# Altium PCB serdes-interface.PcbDoc (part 3 of 3)
Units mm, origin at the board's own origin, x right, y up, seen from the top; angles counter-clockwise.
Board outline 39.62 x 39.62 mm, 6 copper layers (Top Layer, GND1, MidLayer1, VDD_negative, GND2, Bottom Layer); 177 components, 131 nets, 827 pads, 502 vias.
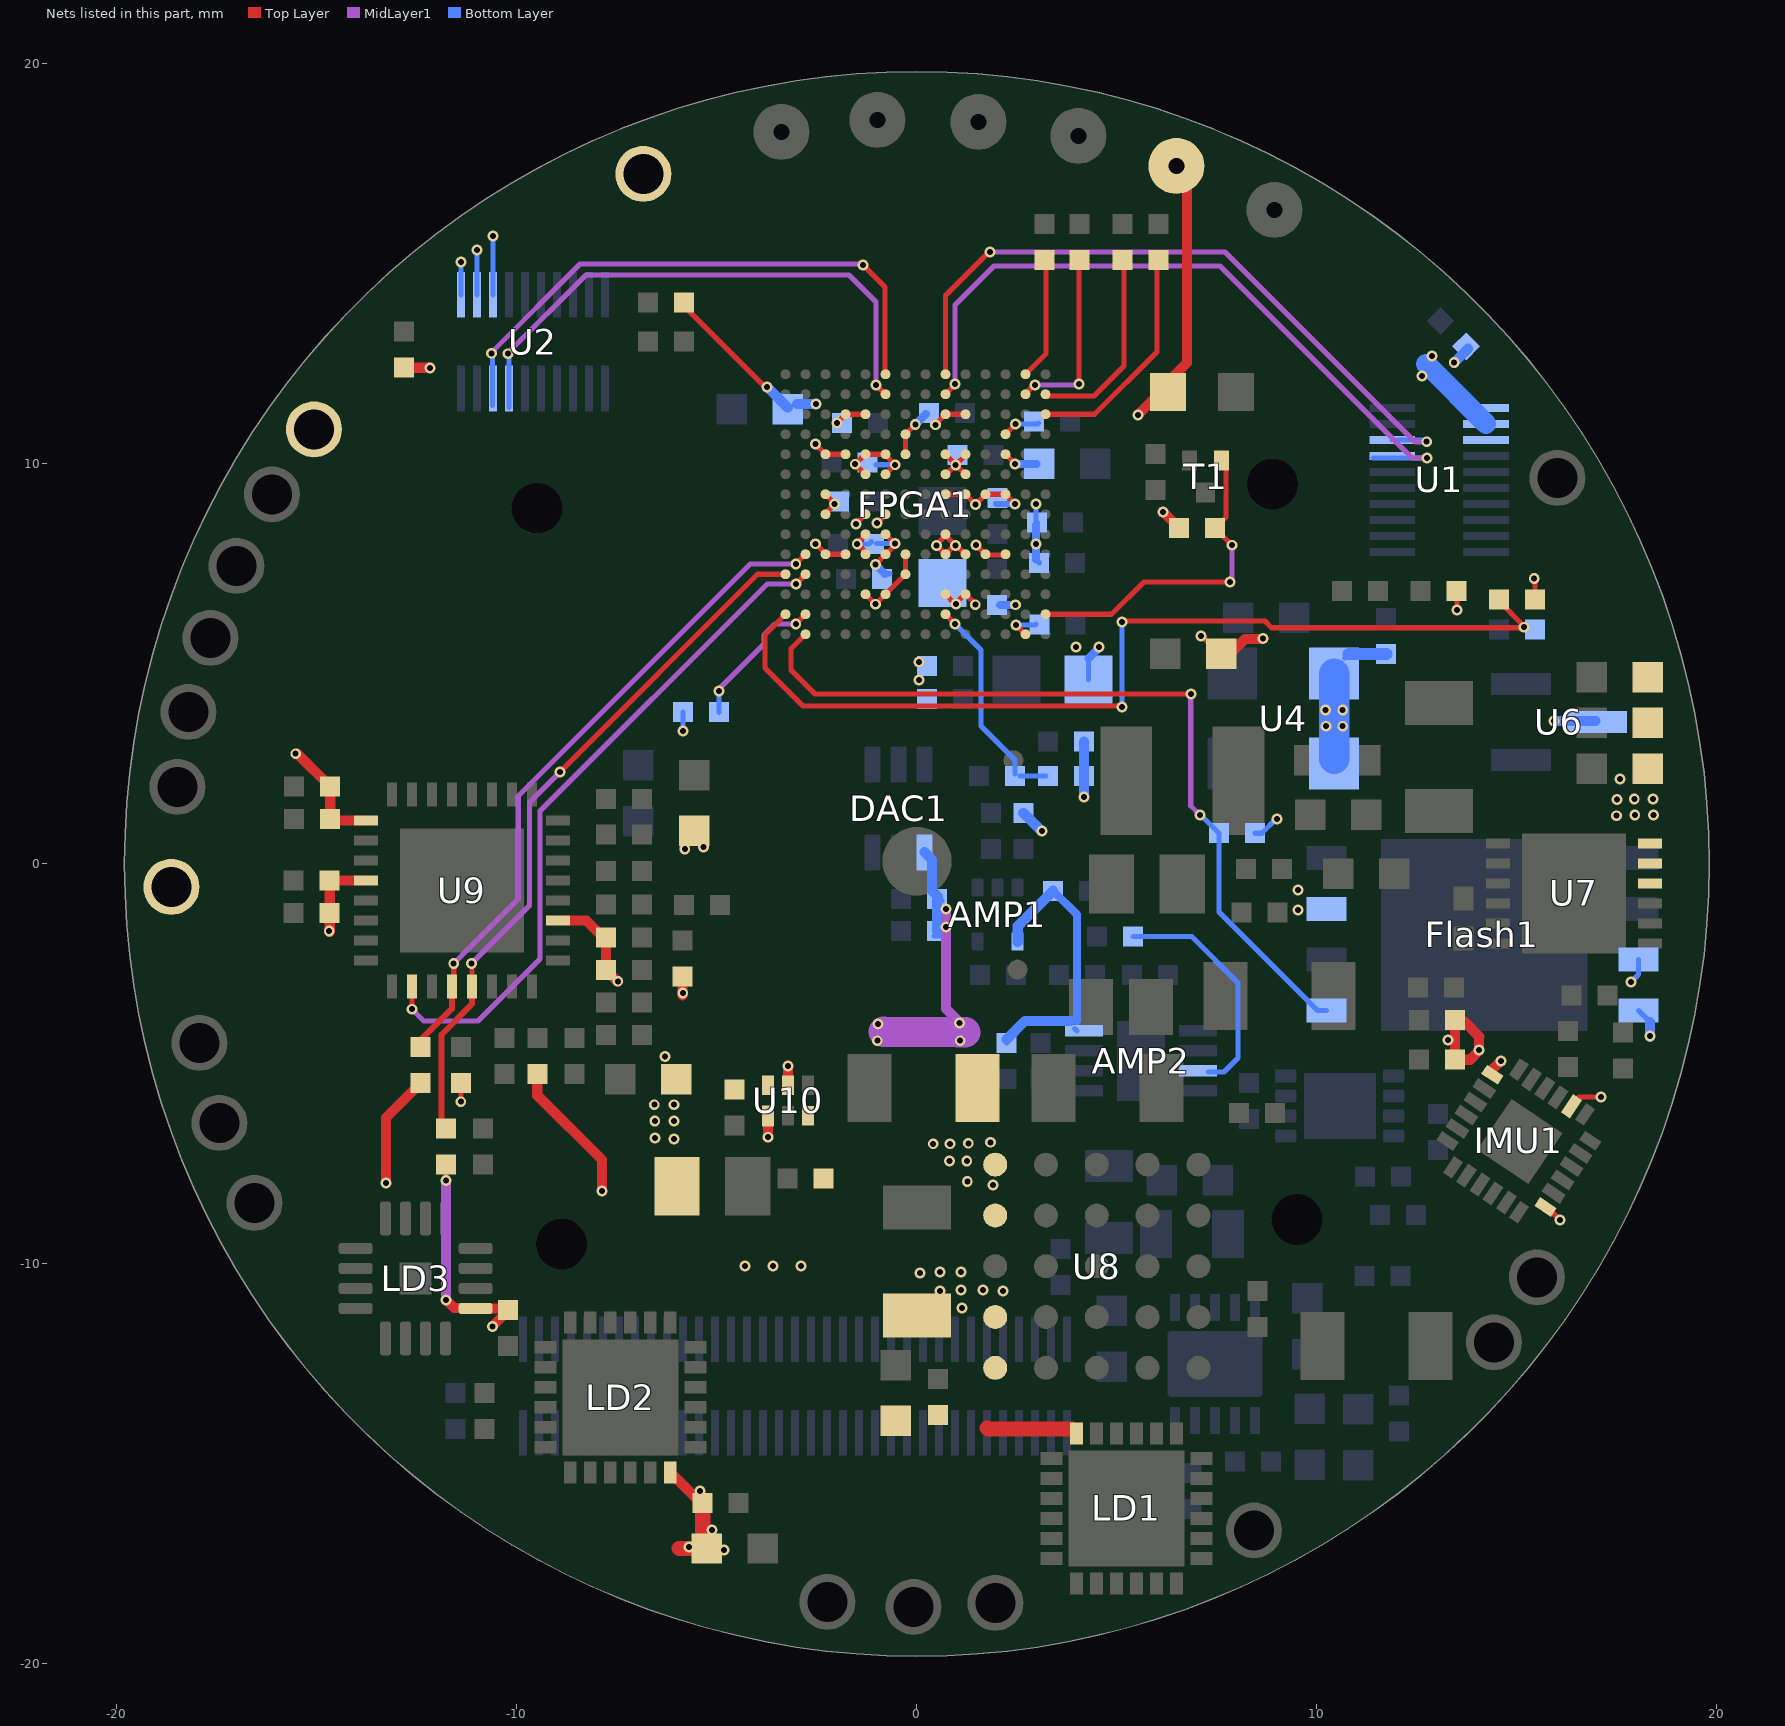
[diagram p7: the nets of this part, all layers, seen from the top]

## Via types
v1: diameter 0.27, hole 0.15, Top Layer to Bottom Layer, tented both sides, 501 vias
v2: diameter 0.5, hole 0.2, Top Layer to Bottom Layer, tented both sides, 1 vias

## Nets (pads, with @x,y where several pads share a name; then routed paths per layer and width w, separated by ;. In a path a pad name is that pad's centre, name@x,y a point inside that pad or via, vN(x,y) a via of type N, cw(c..) or ccw(c..) an arc to the next point about the centre after c; other vN are vias at no path point) (continued)
S_SELCTN: Flash1.1 FPGA1.P2 R15.1 | length 20.8
  Top Layer w0.13: FPGA1.P2@-2.788,5.742 -3.15,5.38 -3.15,4.85 -2.55,4.25 v1(6.85,4.25) v1@6.9,4.25
  MidLayer1 w0.13: v1@6.845,4.25 6.845,1.455 v1(7.075,1.225)
  Bottom Layer w0.13: v1(7.075,1.225) 7.092,1.225 R15.1@7.55,0.767 7.55,-1.2 10.015,-3.665 Flash1.1@10.237,-3.665
SCL: FPGA1.K2 R8.1 U9.4 | length 17
  Top Layer w0.13: U9.4@-11.625,-3.063 -11.582,-3.02 v1(-11.582,-2.489) ; v1@-3.05,7.5 v1(-3.03,7.5) FPGA1.K2@-2.788,7.742
  Top Layer w0.152: R8.1@-12.412,-4.579 -12.412,-4.412 -11.625,-3.624 U9.4@-11.625,-3.063
  MidLayer1 w0.13: v1(-11.582,-2.489) -9.97,-0.876 -9.97,1.699 -4.168,7.5 v1(-3.03,7.5)
SCLK_A+: FPGA1.B9 U1.14 | length 17.8
  Top Layer w0.13: FPGA1.B9@0.712,11.742 v1@0.95,11.98
  MidLayer1 w0.13: v1(0.95,12) 0.95,13.975 1.925,14.95 7.575,14.95 12.375,10.15 v1@12.725,10.15
  Bottom Layer w0.13: U1.14@11.4,10.15 v1(12.75,10.15)
SCLK_A-: FPGA1.A9 U1.13 | length 17.4
  Top Layer w0.13: FPGA1.A9@0.712,12.242 0.712,14.212 v1@1.813,15.312
  MidLayer1 w0.13: v1(1.825,15.3) 7.7,15.3 12.45,10.55 v1@12.75,10.55
  Bottom Layer w0.13: U1.13@11.873,10.601 12.774,10.601 v1@12.8,10.575
  other v1: 12.743,10.555
SCLK_B+: FPGA1.B6 U2.14 | length 14
  Top Layer w0.13: v1(-1.025,11.975) FPGA1.B6@-0.8,11.75 ; FPGA1.B6@-0.788,11.742 FPGA1.B6@-0.783,11.742
  MidLayer1 w0.13: v1@-10.25,12.752 -8.277,14.725 -1.7,14.725 -1.025,14.05 v1(-1.025,11.975)
  Bottom Layer w0.13: U2.14@-10.202,11.41 v1@-10.202,12.698
  other v1: -10.222,12.754
SCLK_B-: FPGA1.A6 U2.13 | length 14.4
  Top Layer w0.13: v1(-1.35,14.975) -0.8,14.425 FPGA1.A6@-0.8,12.225
  MidLayer1 w0.13: v1@-10.62,12.804 -8.424,15 v1@-1.375,15
  Bottom Layer w0.13: U2.13@-10.612,11.459 v1@-10.612,12.747
  other v1: -10.638,12.765
SDA: FPGA1.L1 R7.1 U9.5 | length 17.7
  Top Layer w0.13: U9.5@-11.125,-3.063 v1@-11.125,-2.502 ; v1(-8.925,2.3) -3.983,7.242 FPGA1.L1@-3.288,7.242
  Top Layer w0.152: R7.1@-11.887,-6.502 -11.887,-4.267 -11.125,-3.505 U9.5@-11.125,-3.063
  MidLayer1 w0.13: v1(-11.138,-2.489) -9.69,-1.041 -9.69,1.535 v1(-8.925,2.3)
TEMP: AMP1.4 AMP2.4 C74.2 R43.1 | length 7.1
  Bottom Layer w0.13: R43.1@2.242,-4.475 R43.1@2.242,-4.383 ; AMP2.4@3.937,-4.112 AMP2.4@4,-4.175
  Bottom Layer w0.203: C74.2@3.405,-0.671 4,-1.267 4,-3.925
  Bottom Layer w0.254: R43.1@2.242,-4.383 2.7,-3.925 3.837,-3.925 ; AMP1.4@2.519,-1.944 2.519,-1.557 C74.2@3.405,-0.671
TEMP2: AMP2.7 R42.1 | length 5.9
  Bottom Layer w0.13: R42.1@5.4,-1.817 6.867,-1.817 8.025,-2.975 8.025,-4.85 7.675,-5.2 AMP2.7@7.275,-5.2
VCC33: C39.2 C40.2 C58.2 C59.2 C60.2 T_VCC33.0 U1.8 U1.9 U1.10 U2.8 U2.9 U2.10 U7.10 U7.11 U7.12 | length 7
  Top Layer w0.13: C59.2@18.269,4.669 C59.2@18.269,4.921
  Top Layer w0.254: C40.2@-12.821,12.405 v1@-12.18,12.405
  Bottom Layer w0.13: U2.10@-11.401,14.226 v1@-11.401,15.051 ; U2.9@-11.001,14.226 v1(-11,15.35) ; U2.8@-10.601,14.226 v1@-10.601,15.699 ; 12.675,12.5 12.727,12.5
  Bottom Layer w0.254: v1@13.425,12.533 C39.2@13.779,12.887
  Bottom Layer w0.508: 12.727,12.5 U1.9@14.226,11.001
  other v1: 17.488,1.206 17.945,1.219 18.415,1.219 17.501,1.613 17.932,1.626 18.402,1.626 17.575,2.125 12.625,12.2 -12.175,12.4 13.431,12.537 12.875,12.7 -11.4,15.05 -10.6,15.7
VDD12: C24.2 C25.2 C26.2 C27.2 C28.2 C54.2 C61.2 FPGA1.E5 FPGA1.E6 FPGA1.E9 FPGA1.E10 FPGA1.F5 FPGA1.F6 FPGA1.F9 FPGA1.F10 FPGA1.J5 FPGA1.J6 FPGA1.J9 FPGA1.K5 FPGA1.K6 FPGA1.K9 FPGA1.K10 U8.A1 U8.B1 | length 9.8
  Top Layer w0.13: FPGA1.K5@-1.293,7.737 FPGA1.K5@-1.291,7.735 ; FPGA1.E5@-1.293,10.239 -1.299,10.239 v1(-1.544,9.994) -1.295,9.745 FPGA1.F5@-1.288,9.745 ; FPGA1.E5@-1.288,10.242 FPGA1.E6@-0.788,10.242 -0.788,10.221 v1(-0.546,9.979) -0.551,9.979 FPGA1.F6@-0.788,9.742 ; FPGA1.J5@-1.282,8.224 -1.287,8.224 -1.493,8.017 v1(-1.493,8.001) -1.251,7.759 FPGA1.K5@-1.251,7.723 ; FPGA1.J5@-1.28,8.233 FPGA1.J5@-1.263,8.25 ; FPGA1.K5@-1.279,7.751 FPGA1.K5@-1.275,7.747 ; v1(-1.038,7.488) FPGA1.K6@-0.784,7.742 ; FPGA1.K6@-0.799,7.719 -0.547,7.97 v1(-0.547,8.007) ; FPGA1.J6@-0.788,8.242 -0.563,8.017 v1@-0.544,8.017 ; FPGA1.K6@-0.784,7.761 FPGA1.K6@-0.784,7.742 ; FPGA1.K6@-0.779,7.758 -0.779,7.746 FPGA1.K6@-0.784,7.742 ; FPGA1.K9@0.7,7.75 0.475,7.975 0.725,8.225 FPGA1.J9@0.75,8.225 ; FPGA1.F9@0.703,9.694 0.703,9.709 v1(0.969,9.975) ; FPGA1.J9@0.712,8.242 0.712,8.213 0.967,7.958 v1@0.975,7.95 ; FPGA1.E9@0.712,10.242 0.97,9.983 v1@0.977,9.983 ; FPGA1.K9@0.725,7.75 0.932,7.957 v1(0.966,7.957) ; v1@0.975,7.957 0.993,7.957 v1@1,7.95 ; v1@0.981,7.972 1,7.953 v1@1,7.95 ; FPGA1.K10@1.225,7.725 v1@1,7.95 ; FPGA1.E10@1.236,10.283 1.236,10.242 v1@0.977,9.983 ; FPGA1.F10@1.243,9.721 1.223,9.721 v1(0.969,9.975) ; C54.2@1.515,-5.601 1.515,-5.474 C54.2@1.515,-5.274 ; v1(0.969,9.975) v1@0.977,9.983
  Top Layer w0.152: C54.2@1.515,-5.474 C54.2@1.896,-5.093
  Bottom Layer w0.13: v1(-1.493,8.001) -1.196,8.001 C26.2@-1.144,8.053 ; C28.2@-1.026,9.979 v1(-0.546,9.979) ; C26.2@-1.013,8.007 v1(-0.547,8.007) ; C24.2@-0.805,7.255 C24.2@-0.68,7.255
  Bottom Layer w0.203: v1(-1.038,7.488) C24.2@-0.805,7.255
  other v1: 1.9,-8.025 1.257,-7.938 0.813,-7.429 1.245,-7.429 0.406,-6.998 0.826,-6.998 1.283,-6.985 1.841,-6.96 0.05,4.6 0.05,5.05 0.491,7.957
VDD18: C4.2 C5.2 C6.2 C10.2 C11.2 C12.2 L2.2 L3.1 L4.2 R5.2 T_VDD18.0 U9.11 U9.28 U10.6 | length 5.9
  Top Layer w0.13: U9.28@-13.777,-0.415 U9.28@-13.775,-0.413 ; v1@-11.396,-6.003 R5.2@-11.396,-5.479 ; U10.6@-3.723,-5.528 U10.6@-3.721,-5.529
  Top Layer w0.254: v1@-14.683,-1.7 C5.2@-14.683,-1.227 C6.2@-14.683,-0.415 U9.28@-13.777,-0.415 ; U9.11@-8.848,-1.413 -8.265,-1.413 -7.844,-1.833 C11.2@-7.772,-1.833 C10.2@-7.772,-2.646 -7.493,-2.934 v1(-7.48,-2.934) ; v1@-5.863,-3.285 C12.2@-5.863,-2.818 ; v1(-5.804,0.368) L4.2@-5.804,0.648
  other v1: -6.075,-6.875 -6.55,-6.85 -6.553,-6.426 -6.071,-6.426 -6.566,-6.02 -6.071,-6.02 -11.405,-5.944 -6.299,-4.813 -5.855,-3.226 -14.694,-1.676 -5.334,0.419
VDD33: C3.2 C13.2 C14.2 C21.2 C22.2 C23.2 C29.2 C30.2 C31.2 C32.2 C33.2 C34.2 C35.2 C36.2 C38.2 C41.2 C42.2 C43.2 C44.2 C45.1 C46.1 C47.1 C55.2 C62.2 C63.2 C64.2 C70.1 C71.1 D1.1 DAC1.4 Flash1.3 Flash1.7 Flash1.8 FPGA1.C4 FPGA1.C5 FPGA1.C9 FPGA1.C10 FPGA1.D7 FPGA1.D12 FPGA1.E3 FPGA1.E4 FPGA1.E7 FPGA1.E12 FPGA1.G3 FPGA1.G9 FPGA1.G10 FPGA1.G11 FPGA1.G12 FPGA1.H3 FPGA1.H5 FPGA1.H6 FPGA1.K3 FPGA1.K4 FPGA1.K7 FPGA1.K11 FPGA1.K12 FPGA1.L7 FPGA1.M5 FPGA1.M6 FPGA1.M9 FPGA1.M10 FPGA1.P13 IMU1.1 IMU1.8 IMU1.13 LD1.24 LD2.24 LD3.1 R4.2 R7.2 R8.2 R11.2 R14.1 R15.2 R16.2 R19.2 R20.2 R22.1 R35.1 R41.2 T_VDD33_1.0 T_VDD33_2.0 U4.1 U4.4 U6.3 U8.D1 U8.E1 U9.25 U10.1 U10.3 U10.5 | length 74.3
  Top Layer w0.13: C14.2@-14.67,1.122 C14.2@-14.635,1.087 ; v1@-11.777,-7.819 R7.2@-11.777,-7.511 ; C45.1@-10.236,-11.184 C45.1@-10.236,-11.162 ; R11.2@-5.825,14.033 -5.825,13.95 v1@-3.775,11.9 ; C42.2@-5.378,-16 -5.358,-16 C42.2@-5.325,-16 ; v1@-2.549,10.499 -2.546,10.499 FPGA1.E3@-2.288,10.242 FPGA1.E4@-1.788,10.242 ; v1(-2.535,8.003) FPGA1.K3@-2.293,7.761 ; FPGA1.H3@-2.313,8.698 -2.313,8.739 v1(-2.056,8.996) ; FPGA1.H3@-2.3,8.725 -2.288,8.737 FPGA1.H3@-2.288,8.742 ; FPGA1.K3@-2.288,7.742 FPGA1.K4@-1.788,7.742 -1.786,7.742 FPGA1.K4@-1.784,7.744 ; FPGA1.G3@-2.288,9.242 -2.039,8.992 v1@-2.034,8.992 ; v1@-2.005,11.025 FPGA1.C4@-1.788,11.242 FPGA1.C5@-1.288,11.242 -1.267,11.242 FPGA1.C5@-1.25,11.225 ; FPGA1.K4@-1.776,7.749 FPGA1.K4@-1.765,7.749 ; v1@-1.55,8.5 -1.53,8.5 FPGA1.H5@-1.288,8.742 ; FPGA1.M5@-1.288,6.742 -1.052,6.505 v1@-1.021,6.505 ; v1(-1.034,6.493) v1@-1.021,6.505 ; v1(-1,8.525) -0.8,8.725 FPGA1.H6@-0.775,8.725 ; FPGA1.M6@-0.79,6.742 FPGA1.L7@-0.293,7.239 ; FPGA1.M6@-0.734,6.792 v1@-1.021,6.505 ; C43.2@-0.533,-13.767 C43.2@-0.522,-13.778 ; FPGA1.E7@-0.308,10.247 -0.288,10.267 FPGA1.D7@-0.288,10.742 ; FPGA1.D7@-0.296,10.743 -0.284,10.743 v1(-0.041,10.986) ; FPGA1.L7@-0.288,7.238 FPGA1.L7@-0.288,7.242 FPGA1.K7@-0.288,7.742 ; v1@0.45,11 0.47,11 FPGA1.C9@0.712,11.242 1.183,11.242 FPGA1.C10@1.2,11.225 ; C44.2@0.451,-13.926 C44.2@0.495,-13.881 ; FPGA1.M9@0.712,6.742 0.953,6.5 1.203,6.75 FPGA1.M10@1.225,6.75 ; FPGA1.G9@0.712,9.242 1.198,9.242 FPGA1.G10@1.229,9.21 ; FPGA1.M9@0.725,6.7 FPGA1.M9@0.725,6.717 ; FPGA1.M10@1.2,6.742 FPGA1.M10@1.217,6.725 ; FPGA1.M10@1.223,6.731 1.459,6.494 v1(1.459,6.48) v1@1.459,6.468 ; FPGA1.G10@1.236,9.217 v1@1.464,8.989 ; v1@1.473,8.975 1.473,8.981 v1@1.464,8.989 ; v1(1.475,7.975) 1.725,7.725 2.225,7.725 FPGA1.K12@2.25,7.75 ; FPGA1.G11@1.712,9.242 FPGA1.G12@2.192,9.242 ; FPGA1.G11@1.736,9.238 1.713,9.238 v1@1.464,8.989 ; U8.E1@1.956,-12.56 U8.E1@1.988,-12.592 ; FPGA1.G12@2.212,9.242 2.47,8.984 v1@2.47,8.971 ; FPGA1.E12@2.212,10.242 2.459,9.995 v1@2.459,9.99 ; FPGA1.E12@2.212,10.283 FPGA1.E12@2.233,10.262 ; FPGA1.D12@2.212,10.742 2.45,10.98 v1@2.45,11 ; v1(2.449,9.997) v1@2.45,9.995 ; v1@2.468,10.998 2.474,11.003 v1@2.474,11.014 ; v1(2.475,5.975) FPGA1.P13@2.7,5.75 ; LD1.24@3.875,-14.125 LD1.24@3.986,-14.237 ; D1.1@5.975,11.675 D1.1@6.3,11.675 ; D1.1@6.4,12.15 D1.1@6.4,12.175 ; R19.2@6.525,8.425 R19.2@6.6,8.425 ; v1@7.126,5.701 C21.2@7.493,5.334 ; C21.2@7.601,5.253 C21.2@7.831,5.253 ; R16.2@13.487,6.909 13.487,6.896 13.5,6.883 v1(13.5,6.35) ; C47.1@13.538,-3.937 C47.1@13.678,-3.937 ; IMU1.13@14.325,-5.25 IMU1.13@14.325,-5.2 ; R22.1@15.449,6.609 v1@15.449,7.119 ; IMU1.1@15.714,-8.579 15.754,-8.579 v1(16.075,-8.9) ; IMU1.8@16.375,-6 16.55,-5.825 v1(17.1,-5.825)
  Top Layer w0.254: v1@-15.491,2.756 C13.2@-14.67,1.935 C14.2@-14.67,1.122 ; C14.2@-14.635,1.087 U9.25@-13.775,1.087 ; v1@-13.275,-7.964 -13.275,-6.342 R8.2@-12.412,-5.479 ; v1(-11.775,-10.9) -11.575,-11.1 LD3.1@-11.4,-11.1 ; LD3.1@-11.035,-11.113 C45.1@-10.299,-11.113 ; v1(-10.614,-11.562) C45.1@-10.236,-11.184 ; R4.2@-9.491,-5.258 -9.491,-5.784 -7.875,-7.4 v1(-7.875,-8.175) ; LD2.24@-6.168,-15.21 C42.2@-5.378,-16 ; v1(-3.721,-6.833) U10.1@-3.721,-6.299 ; U10.5@-3.221,-5.529 v1(-3.221,-5.055) ; v1@5.55,11.25 D1.1@5.975,11.675 ; v1(6.15,8.8) R19.2@6.525,8.425 ; D1.1@6.4,12.175 6.75,12.525 6.75,17.185 T_VDD33_1.0@6.485,17.45 ; C21.2@7.831,5.253 8.204,5.626 v1@8.585,5.626 ; C47.1@13.449,-3.937 C46.1@13.449,-4.894 13.831,-4.894 v1@14.05,-4.675 ; C47.1@13.678,-3.937 14.059,-4.318 14.05,-4.327 v1(14.05,-4.65) ; IMU1.13@14.325,-5.2 v1(14.6,-4.925)
  Top Layer w0.381: -5.949,-17.115 C41.2@-5.252,-17.115 ; C41.2@-5.358,-17.032 -5.358,-16 C42.2@-5.358,-15.981 ; C43.2@-0.526,-13.926 C43.2@-0.392,-13.792 ; 1.75,-14.1 1.775,-14.125 LD1.24@3.875,-14.125
  MidLayer1 w0.254: v1@-11.773,-10.889 v1(-11.773,-7.912) ; v1(0.725,-1.125) 0.725,-3.625 v1@1.05,-3.95
  MidLayer1 w0.762: -0.825,-4.2 1.05,-4.203 ; 1.066,-4.203 1.08,-4.203 1.206,-4.204
  Bottom Layer w0.13: v1@-5.85,3.3 R14.1@-5.85,3.792 ; C29.2@-3.232,11.368 C29.2@-3.232,11.407 ; C32.2@0.221,11.248 C32.2@0.221,11.255 ; C71.1@0.425,-1.8 C71.1@0.6,-1.8 ; C70.1@0.45,-0.75 C70.1@0.625,-0.925 ; C64.2@1.965,9.007 C64.2@1.974,8.997 ; C22.2@2.057,6.454 C22.2@2.081,6.477 ; v1(2.465,11.001) 3.017,11.001 C33.2@3.037,11.021 ; v1(2.475,5.975) 2.95,5.975 C36.2@2.975,6 ; C30.2@2.975,7.608 C30.2@3.055,7.529 ; v1(2.975,9) 2.975,8.562 C35.2@3.007,8.531 ; C34.2@2.986,9.997 C34.2@2.994,10.005 ; v1(4.175,1.675) 4.15,1.675 4.15,1.625 v1@4.2,1.675 ; C62.2@4.285,4.607 C62.2@4.285,5.135 ; R15.2@8.45,0.767 8.617,0.767 v1@9,1.15 ; U4.1@10.427,2.629 U4.1@10.643,2.413 ; U4.4@10.695,5.145 U4.4@10.797,5.247 ; v1(17.85,-2.95) 18.037,-2.763 Flash1.7@18.037,-2.395 ; Flash1.8@18.037,-3.665 Flash1.8@18.325,-3.953
  Bottom Layer w0.152: C64.2@1.974,8.997 v1(2.451,8.997)
  Bottom Layer w0.203: v1(-0.041,10.986) C32.2@0.221,11.248 ; C22.2@2.081,6.477 v1(2.465,6.477) ; v1(2.449,9.997) C34.2@2.986,9.997 ; C30.2@2.975,7.608 v1(2.975,8) C35.2@2.975,8.475 ; C62.2@4.285,5.135 4.55,5.4 v1(4.55,5.425)
  Bottom Layer w0.254: v1(-3.75,11.925) C29.2@-3.232,11.407 ; C29.2@-3,11.5 v1(-2.525,11.5) ; DAC1.4@0.192,0.29 0.375,0.107 0.375,-0.675 C70.1@0.525,-0.825 ; C71.1@0.505,-1.671 C70.1@0.505,-0.871 ; R41.2@2.658,1.275 v1@3.108,0.825 ; v1(4.175,1.675) R35.1@4.175,3.058 ; v1(15.925,3.575) U6.3@16.964,3.575 ; v1@18.325,-4.325 Flash1.8@18.325,-3.953
  Bottom Layer w0.305: U4.4@10.797,5.247 C38.2@11.73,5.247
  Bottom Layer w0.762: U4.1@10.427,2.629 U4.4@10.427,4.759
  other v1: -4.825,-17.15 -5.7,-17.075 -5.125,-16.65 -5.425,-15.675 1.125,-11.1 0.575,-10.675 2.15,-10.675 1.1,-10.65 1.65,-10.65 0.075,-10.225 0.575,-10.2 1.1,-10.2 -4.3,-10.05 -3.6,-10.05 -2.9,-10.05 -13.275,-7.975 -0.991,-4.42 1.079,-4.42 13.275,-4.4 18.325,-4.3 -0.978,-4 1.067,-3.975 0.725,-1.575 9.525,-1.15 9.525,-0.65 3.125,0.825 9,1.125 -15.532,2.756 -5.85,3.325 10.223,3.442 10.643,3.442 10.211,3.848 10.643,3.848 3.975,5.425 8.649,5.639 7.1,5.7 0.975,6.5 15.43,7.137 -1.525,8.5 1.464,8.988 -2.538,10.495 0.465,10.977 -2,11.025 5.525,11.225
VS: FPGA1.L2 U9.2 | length 17.3
  Top Layer w0.13: v1@-12.625,-3.631 U9.2@-12.625,-3.063 ; v1(-3.025,7) -2.788,7.237 FPGA1.L2@-2.788,7.242
  MidLayer1 w0.13: v1(-12.624,-3.632) -12.332,-3.924 -10.973,-3.924 -9.423,-2.375 -9.423,1.321 -3.744,7 v1(-3.025,7)
X_DONE: FPGA1.N14 R19.1 T1.1 | length 8.5
  Top Layer w0.13: FPGA1.N14@3.212,6.242 4.867,6.242 5.675,7.05 v1(7.825,7.05) ; T1.1@7.725,10.275 7.725,8.667 R19.1@7.45,8.392 v1(7.875,7.967)
  MidLayer1 w0.13: v1@7.875,7 v1(7.875,7.967)
X_INIT: FPGA1.N2 R14.2 | length 3.6
  Top Layer w0.13: v1@-3,6.03 FPGA1.N2@-2.788,6.242
  MidLayer1 w0.13: v1@-4.95,4.375 -3.825,5.5 -3.825,5.725 -3.55,6 v1(-3.03,6)
  Bottom Layer w0.13: R14.2@-4.95,3.792 v1(-4.95,4.325)
X_M1: FPGA1.N9 R20.1 R21.2 | length 5.3
  Top Layer w0.13: FPGA1.N9@0.712,6.242 v1@0.928,6.025
  Bottom Layer w0.13: v1(0.95,6) 1.6,5.35 1.6,3.45 2.45,2.6 R21.2@2.45,2.25 ; R21.2@2.575,2.2 R20.1@3.225,2.2
X_PROG: FPGA1.N1 R22.2 R23.1 | length 24
  Top Layer w0.13: FPGA1.N1@-3.288,6.242 -3.8,5.73 -3.8,4.9 -2.85,3.95 4.359,3.95 4.361,3.951 4.589,3.951 4.591,3.95 5.125,3.95 v1(5.125,3.925) ; v1@5.15,6.071 8.7,6.071 8.865,5.905 15.138,5.905 15.176,5.944 14.549,6.571 R22.2@14.549,6.609 ; R22.2@14.453,6.731 R22.2@14.503,6.731
  Bottom Layer w0.13: v1@5.125,4.05 v1(5.125,6.05)
  other v1: 15.176,5.918
X_TCK: FPGA1.B13 R27.2 | length 4.5
  Top Layer w0.13: FPGA1.B13@2.712,11.742 2.712,11.762 2.925,11.975 v1(2.95,11.975) ; v1(4.05,12) 4.05,15.025 R27.2@4.075,15.05
  MidLayer1 w0.13: v1(2.95,11.975) 4.025,11.975 v1(4.05,12)
X_TDI: FPGA1.A13 R26.2 | length 3
  Top Layer w0.13: FPGA1.A13@2.712,12.242 3.225,12.755 R26.2@3.225,15.05
X_TDO: FPGA1.C14 R25.2 | length 5.7
  Top Layer w0.13: FPGA1.C14@3.212,11.242 4.442,11.242 6,12.8 R25.2@6,15.1
X_TMS: FPGA1.B14 R24.2 | length 4.9
  Top Layer w0.13: FPGA1.B14@3.212,11.742 3.255,11.699 4.424,11.699 5.175,12.45 R24.2@5.175,15.05
pads on no net: FPGA1.A2 FPGA1.C8 FPGA1.C11 FPGA1.C12 FPGA1.C13 FPGA1.D3 FPGA1.D4 FPGA1.D8 FPGA1.D11 FPGA1.D13 FPGA1.D14 FPGA1.E13 FPGA1.E14 FPGA1.F3 FPGA1.F4 FPGA1.F11 FPGA1.F12 FPGA1.F13 FPGA1.G13 FPGA1.H11 FPGA1.H12 FPGA1.H13 FPGA1.J3 FPGA1.J4 FPGA1.J11 FPGA1.J12 FPGA1.J13 FPGA1.K13 FPGA1.L4 FPGA1.L8 FPGA1.L13 FPGA1.M4 FPGA1.M8 FPGA1.M13 FPGA1.M14 FPGA1.N7 FPGA1.N10 FPGA1.N12 FPGA1.P10 FPGA1.P12 IMU1.2 IMU1.3 IMU1.4 IMU1.5 IMU1.6 IMU1.7 IMU1.12 IMU1.14 IMU1.15 IMU1.16 IMU1.17 IMU1.19 IMU1.21 IMU1.PAD LD2.22 LD3.5 LD3.6 LD3.8 LD3.9 LD3.10 LD3.13 LD3.16 LD3.PAD SW1.2 SW1.5 U7.5 U8.A5 U8.B4 U8.C3 U8.D4 U8.E3

## Polygon pours and split planes (outlines as drawn)
GND on Top Layer "Top Layer-No Net" (solid, pour order 25): 6.553,-5.375 10.338,-5.375 10.338,-12.471 6.553,-12.471 6.553,-5.375
+VCOAX_5.5V on Top Layer "Top Layer-No Net" (solid, pour order 31): 2.616,-10.465 6.439,-10.465 6.439,-13.375 2.616,-13.375 2.616,-10.465
+VCOAX_5.5V on Top Layer "Top Layer-No Net" (solid, pour order 32): 3.531,-8.382 6.35,-8.382 6.35,-13.375 3.531,-13.375 3.531,-8.382
+VCOAX_5.5V on Top Layer "Top Layer-No Net" (solid, pour order 33): 2.73,-4.775 6.35,-4.775 6.35,-9.068 2.73,-9.068 2.73,-4.775
GND on Top Layer "Top Layer-No Net" (solid, pour order 34): 0.305,-5.093 3.543,-5.093 3.543,-10.808 0.305,-10.808 0.305,-5.093
VDD33 on Top Layer "Top Layer-No Net" (solid, pour order 36): -5.956,-9.982 2.286,-9.982 2.286,-13.424 -5.956,-13.424 -5.956,-9.982
GND on Top Layer "Top Layer-No Net" (solid, pour order 37): -1.765,-3.746 2.908,-3.746 2.908,-9.639 -1.765,-9.639 -1.765,-3.746
VDD12 on Top Layer "Top Layer-No Net" (solid, pour order 38): -0.089,-3.746 2.54,-3.746 2.54,-9.093 -0.089,-9.093 -0.089,-3.746
VDD33 on Top Layer "Top Layer-No Net" (solid, pour order 35): -2.87,-5.918 -1.981,-5.918 -1.981,-10.084 -2.87,-10.084 -2.87,-5.918
+VCOAX_5.5V on Top Layer "Top Layer-No Net" (solid, pour order 30): 11.155,3.499 14.975,3.499 14.975,-1.85 11.155,-1.85 11.155,3.499
VCC33 on Top Layer "Top Layer-No Net" (solid, pour order 29): 16.971,3.416 18.7,3.416 18.7,-0.572 16.971,-0.572 16.971,3.416
VCC33 on Top Layer "Top Layer-No Net" (solid, pour order 28): 17.417,5.188 18.7,5.188 18.7,1.2 17.417,1.2 17.417,5.188
VDD18 on Top Layer "Top Layer-No Net" (solid, pour order 27): -6.807,-4.572 -5.012,-4.572 -5.012,-9.83 -6.807,-9.83 -6.807,-4.572
VDD18 on Top Layer "Top Layer-No Net" (solid, pour order 26): -5.537,-4.572 -3.543,-4.572 -3.543,-5.898 -5.537,-5.898 -5.537,-4.572
+VCOAX_5.5V on Top Layer "Component Side-No Net" (solid, pour order 20): 8.05,-2.437 9.575,-2.437 9.575,-5.012 8.05,-5.012 8.05,-2.437
-15V on Bottom Layer "Component Side-No Net" (solid, pour order 24): 9.225,-14.35 12.075,-14.35 12.075,-15.675 9.225,-15.675 9.225,-14.35
no net on Bottom Layer "Component Side-No Net" (solid, pour order 23): -6.025,-11.175 -2.5,-11.175 -2.5,-13.106 -6.025,-13.106 -6.025,-11.175
GND on Bottom Layer "Component Side-No Net" (solid, pour order 22): -10.01,-11.015 3.725,-11.015 3.725,-15.125 -10.01,-15.125 -10.01,-11.015
GND on Bottom Layer "Component Side-No Net" (solid, remove dead copper, pour order 21): -20.335,21.685 21.575,21.685 21.575,-20.4 -20.335,-20.4 -20.335,21.685
GND on GND1 (split plane): 228 vertices, not listed, extent -19.305,-19.302 19.299,19.301
VCC33 on VDD_negative (split plane): 0.603,19.292 1.209,19.264 1.813,19.216 2.416,19.15 3.016,19.064 3.614,18.96 4.208,18.837 4.797,18.695 5.382,18.535 5.962,18.357 6.535,18.161 7.102,17.946 7.663,17.714 8.215,17.465 8.76,17.198 9.296,16.914 9.822,16.614 10.339,16.297 10.846,15.964 11.342,15.615 11.827,15.251 12.3,14.872 12.762,14.478 13.21,14.07 13.645,13.648 14.067,13.213 14.476,12.764 14.869,12.303 15.248,11.83 15.613,11.345 15.961,10.849 16.294,10.342 16.611,9.825 16.911,9.299 17.195,8.763 17.462,8.218 17.711,7.666 17.943,7.105 18.158,6.538 18.354,5.964 18.532,5.385 18.692,4.8 18.834,4.21 18.957,3.617 19.061,3.019 19.147,2.419 19.213,1.816 19.261,1.212 19.289,0.606 19.299,0.02 19.297,0 19.299,-0.02 19.289,-0.606 19.282,-0.768 16.3,-0.768 16.3,7.664 16.3,7.779 6.725,7.779 6.725,11.737 6.6,11.737 6.6,11.725 -15.333,11.725 -15.254,11.83 -14.875,12.303 -14.482,12.764 -14.073,13.213 -13.651,13.648 -13.216,14.07 -12.768,14.478 -12.306,14.872 -11.833,15.251 -11.348,15.615 -10.852,15.964 -10.345,16.297 -9.828,16.614 -9.302,16.914 -8.766,17.198 -8.221,17.465 -7.669,17.714 -7.108,17.946 -6.541,18.161 -5.968,18.357 -5.388,18.535 -4.803,18.695 -4.214,18.837 -3.62,18.96 -3.022,19.064 -2.422,19.15 -1.819,19.216 -1.215,19.264 -0.609,19.292 -0.023,19.301 -0.003,19.299 0.017,19.301
VDD12 on VDD_negative (split plane): 1.397,9.449 0.406,9.449 0.406,8.445 0.406,8.42 1.2,8.42 1.2,7.544 0.572,7.544 0.572,7.45 0.572,-6.032 3.225,-6.032 3.225,-8.7 -0.675,-8.7 -0.675,6.9 -0.675,7.033 -1.65,7.033 -1.65,8.2 -0.6,8.2 -0.6,8.35 -0.6,9.386 -0.6,9.525 -1.768,9.525 -1.768,10.414 1.397,10.414
+VCOAX_5.5V on VDD_negative (split plane): 11.537,-13.95 11.4,-13.95 11.4,-14.077 13.203,-14.077 12.762,-14.479 12.3,-14.872 11.827,-15.252 11.342,-15.616 10.846,-15.964 10.339,-16.297 9.822,-16.614 9.296,-16.914 8.76,-17.198 8.215,-17.465 7.663,-17.714 7.102,-17.947 6.535,-18.161 5.962,-18.357 5.382,-18.536 4.797,-18.696 4.208,-18.837 3.614,-18.96 3.016,-19.064 2.416,-19.15 1.813,-19.216 1.209,-19.264 0.603,-19.292 0.017,-19.302 -0.003,-19.3 -0.023,-19.302 -0.609,-19.292 -1.215,-19.264 -1.819,-19.216 -2.422,-19.15 -3.022,-19.064 -3.62,-18.96 -4.214,-18.837 -4.803,-18.696 -5.388,-18.536 -5.968,-18.357 -6.541,-18.161 -7.108,-17.947 -7.669,-17.714 -8.221,-17.465 -8.766,-17.198 -9.302,-16.914 -9.828,-16.614 -10.345,-16.297 -10.852,-15.964 -11.348,-15.616 -11.833,-15.252 -12.306,-14.872 -12.768,-14.479 -13.216,-14.071 -13.651,-13.649 -14.073,-13.213 -14.482,-12.765 -14.875,-12.304 -15.254,-11.83 -15.619,-11.345 -15.967,-10.849 -16.3,-10.343 -16.617,-9.826 -16.917,-9.299 -17.201,-8.763 -17.468,-8.218 -17.717,-7.666 -17.724,-7.65 -13.748,-7.65 -13.748,-10.687 -13.625,-10.687 -13.625,-10.693 -0.95,-10.693 -0.95,-15.1 -5.875,-15.1 -5.875,-17.525 2.475,-17.525 2.475,-12.175 6.625,-12.175 6.8,-12.175 6.8,-2.55 11.537,-2.55
VDD18 on VDD_negative (split plane): -5.143,-7.55 -17.765,-7.55 -17.949,-7.106 -18.164,-6.538 -18.36,-5.965 -18.538,-5.385 -18.698,-4.8 -18.84,-4.211 -18.963,-3.617 -19.067,-3.02 -19.153,-2.419 -19.219,-1.817 -19.267,-1.212 -19.295,-0.606 -19.305,-0.02 -19.303,0 -19.305,0.02 -19.295,0.606 -19.286,0.8 -5.143,0.8
VDD33 on VDD_negative (split plane): 6.6,7.625 6.725,7.625 6.725,7.664 16.175,7.664 16.175,-0.85 16.175,-0.883 19.276,-0.883 19.261,-1.212 19.213,-1.817 19.147,-2.419 19.061,-3.02 18.957,-3.617 18.834,-4.211 18.692,-4.8 18.532,-5.385 18.354,-5.965 18.158,-6.538 17.943,-7.106 17.711,-7.666 17.462,-8.218 17.195,-8.763 16.911,-9.299 16.611,-9.826 16.294,-10.343 15.961,-10.849 15.613,-11.345 15.248,-11.83 14.869,-12.304 14.476,-12.765 14.067,-13.213 13.645,-13.649 13.334,-13.95 11.662,-13.95 11.662,-2.425 6.625,-2.425 6.625,-2.55 6.625,-12.05 2.261,-12.05 2.261,-17.35 -5.7,-17.35 -5.7,-15.25 -0.775,-15.25 -0.775,-10.693 -0.775,-10.452 -13.525,-10.452 -13.525,-7.65 -5.004,-7.65 -5.004,0.8 -5.004,0.902 -19.281,0.902 -19.267,1.212 -19.219,1.816 -19.153,2.419 -19.067,3.019 -18.963,3.617 -18.84,4.21 -18.698,4.8 -18.538,5.385 -18.36,5.964 -18.164,6.538 -17.949,7.105 -17.717,7.666 -17.468,8.218 -17.201,8.763 -16.917,9.299 -16.617,9.825 -16.3,10.342 -15.967,10.849 -15.619,11.345 -15.427,11.6 6.6,11.6
GND on GND2 (split plane): 226 vertices, not listed, extent -19.305,-19.302 19.299,19.301

## Keep-outs
Keep-Out Layer:
  circle w0.1: c0,0 r20

## Other copper
Top Layer:
  rectangle net +VCOAX_5.5V: 11.15,-1.85 12.35,-0.475
  rectangle net GND: 3.4,-4.275 4.15,-2.875
  rectangle net VDD33: -0.925,-14.325 2.3,-13.275
  rectangle net VCC33: -11.5,13.2 -11.3,15.05
  rectangle net VCC33: -11.1,13.2 -10.9,15.3
  rectangle net VCC33: -10.7,13.2 -10.5,15.7
  rectangle net GND: -10.3,13.2 -10.1,15.375
  rectangle net GND: -9.9,13.225 -9.7,15.65
  rectangle net GND: -9.5,13.2 -9.3,15.9
  rectangle net GND: -8.7,13.2 -8.5,15.95
  rectangle net GND: -8.3,13.175 -8.1,15.875
  rectangle net GND: -7.65,13.275 -7.45,15.975
MidLayer1:
  rectangle net +15V: 4.325,-12.1 5.55,-10.525
  rectangle net -15V: 10.2,-15.625 11.425,-14.05
Bottom Layer:
  rectangle net ESTIM_OUT: 3.725,-6.3 4.65,-5.775
  rectangle net TEMP: 3.65,-4.325 4.675,-3.775
  rectangle net GND: 12.5,-7.4 13.3,-6.75
  rectangle net GND: 2.175,-3.1 3.075,-2.45
  rectangle net GND: -1.15,-2.45 -0.125,-0.6
  rectangle net GCLK: 7.325,5.8 8.475,6.75
  rectangle net VDD33: 9.35,-1.5 10.775,-0.475
  rectangle net +15V: 4.3,-11.975 5.925,-10.675
  rectangle net +15V: 6.55,-6.525 7.675,-5.525
  rectangle net -15V: 1.8,-1.125 2.25,-0.325
  rectangle net -15V: 6,-5.925 6.325,-3.925
  rectangle net VDD33: 0.075,-2 0.825,-0.6
  rectangle net +15V: 1.025,-3.05 1.55,-0.9
  rectangle net +VCOAX_5.5V: 3.95,-8.675 6.525,-7.15
  rectangle net VDD12: -0.025,3.8 0.55,5.4
  rectangle net GND: 0.8,3.575 1.425,5.225
  rectangle net VDD33: 3.65,4 4.9,5.475
  rectangle net VDD33: 17.425,-4.475 18.675,-2.075
  rectangle net X_PROG: 14.975,5.525 15.8,6.15
  rectangle net GND: 3.875,-15.2 4.9,-14.65
  rectangle net GND: 13.425,9.3 14.95,10.3
  rectangle net GND: 13.5,7.675 15.2,8.7
  rectangle net VCC33: 13.225,10.45 14.975,11.675
  rectangle net GND: 4.3,-13.25 5.3,-12.175
  rectangle net GND: 13.2,7.675 13.525,10.3
  rectangle net VCC33: -11.5,13.2 -11.3,14.8
  rectangle net VCC33: -11.1,13.2 -10.9,14.8
  rectangle net GND: -10.3,13.2 -10.1,14.8
  rectangle net VCC33: -10.7,13.2 -10.5,14.8
  rectangle net GND: -9.5,13.2 -9.3,14.8
  rectangle net GND: -9.9,13.2 -9.7,14.8
  rectangle net GND: -8.7,13.2 -8.5,14.8
  rectangle net AUXOUT_HSA_B: -9.1,13.2 -8.9,14.8
  rectangle net GND: -7.9,13.2 -7.7,14.8
  rectangle net GND: -8.3,13.2 -8.1,14.8
  rectangle net C\S\_A-: 10.7,11.3 13,11.5
  rectangle net C\S\_A+: 10.7,10.9 13,11.1
  rectangle net SCLK_A-: 10.7,10.5 13,10.7
  rectangle net SCLK_A+: 10.7,10.1 13,10.3
  rectangle net MOSI_A-: 11.225,9.7 12.95,9.9
  rectangle net MOSI_A+: 11.25,9.3 12.975,9.5
  rectangle net MISO_A1-: 11.225,8.9 12.95,9.1
  rectangle net MISO_A1+: 11.225,8.5 12.95,8.7
  rectangle net MISO_A2-: 11.225,8.1 12.95,8.3
  rectangle net MISO_A2+: 11.225,7.7 12.95,7.9
  rectangle net C\S\_B-: -11.5,10.85 -11.3,12.45
  rectangle net C\S\_B+: -11.1,10.875 -10.9,12.475
  rectangle net SCLK_B-: -10.7,10.85 -10.5,12.45
  rectangle net SCLK_B+: -10.3,10.925 -10.1,12.525
  rectangle net MOSI_B-: -9.9,10.9 -9.7,12.5
  rectangle net MOSI_B+: -9.5,10.9 -9.3,12.5
  rectangle net MISO_B1-: -9.1,10.875 -8.9,12.475
  rectangle net MISO_B1+: -8.7,10.875 -8.5,12.475
  rectangle net MISO_B2-: -8.3,10.9 -8.1,12.5
  rectangle net MISO_B2+: -7.9,10.875 -7.7,12.475
  pour cut-out: -15.075,19.375 -6.875,19.375 -6.875,13.45 -15.075,13.45
  pour cut-out: 12.325,16.05 18.45,16.05 18.45,7.575 12.325,7.575
GND1 (plane layer: these items are gaps in the copper):
  pour cut-out: 16.288,7.775 16.425,7.775 16.425,-0.902 16.288,-0.902
  pour cut-out: 6.604,7.775 16.396,7.775 16.396,7.664 6.604,7.664
  pour cut-out: 6.604,12.75 6.775,12.75 6.775,7.743 6.604,7.743
  pour cut-out: -7.1,12.775 6.748,12.775 6.748,12.675 -7.1,12.675
  pour cut-out: -7.125,12.725 -7,12.725 -7,11.6 -7.125,11.6
  pour cut-out: -17.818,11.75 -7,11.75 -7,11.6 -17.818,11.6
VDD_negative (plane layer: these items are gaps in the copper):
  pour cut-out: -20.65,0.902 -5.004,0.902 -5.004,0.8 -20.65,0.8
  pour cut-out: -19.791,-7.55 -5.059,-7.55 -5.059,-7.65 -19.791,-7.65
  pour cut-out: -5.143,0.902 -5.004,0.902 -5.004,-7.65 -5.143,-7.65
  pour cut-out: -0.775,7.025 -0.675,7.025 -0.675,-8.814 -0.775,-8.814
  pour cut-out: 0.572,7.544 0.65,7.544 0.65,-6.032 0.572,-6.032
  pour cut-out: 0.572,-5.9 3.324,-5.9 3.324,-6.032 0.572,-6.032
  pour cut-out: -0.725,-8.7 3.353,-8.7 3.353,-8.814 -0.725,-8.814
  pour cut-out: 3.225,-5.9 3.353,-5.9 3.353,-8.814 3.225,-8.814
  pour cut-out: -1.725,7.033 -0.675,7.033 -0.675,6.9 -1.725,6.9
  pour cut-out: 0.572,7.544 1.275,7.544 1.275,7.45 0.572,7.45
  pour cut-out: 1.2,8.54 1.275,8.54 1.275,7.475 1.2,7.475
  pour cut-out: -1.775,8.35 -1.65,8.35 -1.65,6.9 -1.775,6.9
  pour cut-out: -1.709,8.35 -0.6,8.35 -0.6,8.2 -1.709,8.2
  pour cut-out: -0.737,9.525 -0.6,9.525 -0.6,8.2 -0.737,8.2
  pour cut-out: -1.855,9.525 -0.6,9.525 -0.6,9.386 -1.855,9.386
  pour cut-out: -1.875,10.528 1.613,10.528 1.613,10.414 -1.875,10.414
  pour cut-out: -1.875,10.525 -1.768,10.525 -1.768,9.382 -1.875,9.382
  pour cut-out: 0.406,9.449 0.521,9.449 0.521,8.445 0.406,8.445
  pour cut-out: 0.47,9.449 1.587,9.449 1.587,9.322 0.47,9.322
  pour cut-out: 1.397,10.503 1.613,10.503 1.613,9.322 1.397,9.322
  pour cut-out: 0.406,8.547 1.275,8.547 1.275,8.42 0.406,8.42
  pour cut-out: -13.625,-10.452 -0.775,-10.452 -0.775,-10.693 -13.625,-10.693
  pour cut-out: -0.95,-10.465 -0.775,-10.465 -0.775,-15.25 -0.95,-15.25
  pour cut-out: -5.8,-17.35 2.475,-17.35 2.475,-17.525 -5.8,-17.525
  pour cut-out: 2.261,-12.05 2.475,-12.05 2.475,-17.525 2.261,-17.525
  pour cut-out: 2.275,-12.05 6.775,-12.05 6.775,-12.175 2.275,-12.175
  pour cut-out: 6.625,-2.425 6.8,-2.425 6.8,-12.175 6.625,-12.175
  pour cut-out: 11.4,-13.95 16.081,-13.95 16.081,-14.077 11.4,-14.077
  pour cut-out: -17.828,11.725 -7.325,11.725 -7.325,11.6 -17.828,11.6
  pour cut-out: -7.429,11.725 6.718,11.725 6.718,11.6 -7.429,11.6
  pour cut-out: 6.6,11.737 6.725,11.737 6.725,7.625 6.6,7.625
  pour cut-out: 6.604,7.779 16.3,7.779 16.3,7.664 6.604,7.664
  pour cut-out: 16.175,7.775 16.3,7.775 16.3,-0.85 16.175,-0.85
  pour cut-out: 16.175,-0.768 20.422,-0.768 20.422,-0.883 16.175,-0.883
  pour cut-out: -13.748,-7.612 -13.525,-7.612 -13.525,-10.687 -13.748,-10.687
  pour cut-out: -5.875,-15.1 -0.8,-15.1 -0.8,-15.25 -5.875,-15.25
  pour cut-out: -5.875,-15.1 -5.7,-15.1 -5.7,-17.525 -5.875,-17.525
  pour cut-out: 6.625,-2.425 11.6,-2.425 11.6,-2.55 6.625,-2.55
  pour cut-out: 11.537,-2.425 11.662,-2.425 11.662,-14.071 11.537,-14.071
GND2 (plane layer: these items are gaps in the copper):
  pour cut-out: 16.288,7.775 16.402,7.775 16.402,-0.902 16.288,-0.902
  pour cut-out: 6.604,7.775 16.396,7.775 16.396,7.664 6.604,7.664
  pour cut-out: 6.604,12.775 6.775,12.775 6.775,7.768 6.604,7.768
  pour cut-out: -7.125,12.8 6.775,12.8 6.775,12.675 -7.125,12.675
  pour cut-out: -7.125,12.725 -7,12.725 -7,11.6 -7.125,11.6
  pour cut-out: -17.818,11.75 -7,11.75 -7,11.6 -17.818,11.6

## Silkscreen, mask and mechanical layers (free items; w line width, h text height)
Top Overlay:
  circle w0.051: c0,0 r18.611
  lines w0.102: -16.545,-8.297 -9.183,-13.541 ; -10.429,-15.456 11.075,16.424 ; -9.19,-13.55 -2.281,-18.472
  lines w0.127: -8.255,-3.048 -6.477,-3.048 -6.477,2.032 -8.255,2.032 -8.255,-3.048
Bottom Overlay:
  lines w0.102: -3.35,7.2 -0.024,7.302 ; 0.8,3.75 1.675,6.1 ; 2.125,8.75 5.401,7.403
Mechanical 15:
  circle w0.051: c-8.89,-9.5 r1.25
  circle w0.051: c9.5,-8.89 r1.25
  circle w0.051: c-9.5,8.89 r1.25
  circle w0.051: c8.89,9.5 r1.25